# Altium PCB JacdacEdgeConnectorSlotsTest 93.PcbDoc
Units mm, origin at the board's own origin, x right, y up, seen from the top; angles counter-clockwise.
Board outline 54.54 x 20.7 mm, 2 copper layers (Top Layer, Bottom Layer), stack 1.525 mm thick; 10 components, 1 nets, 116 pads, 10 vias.
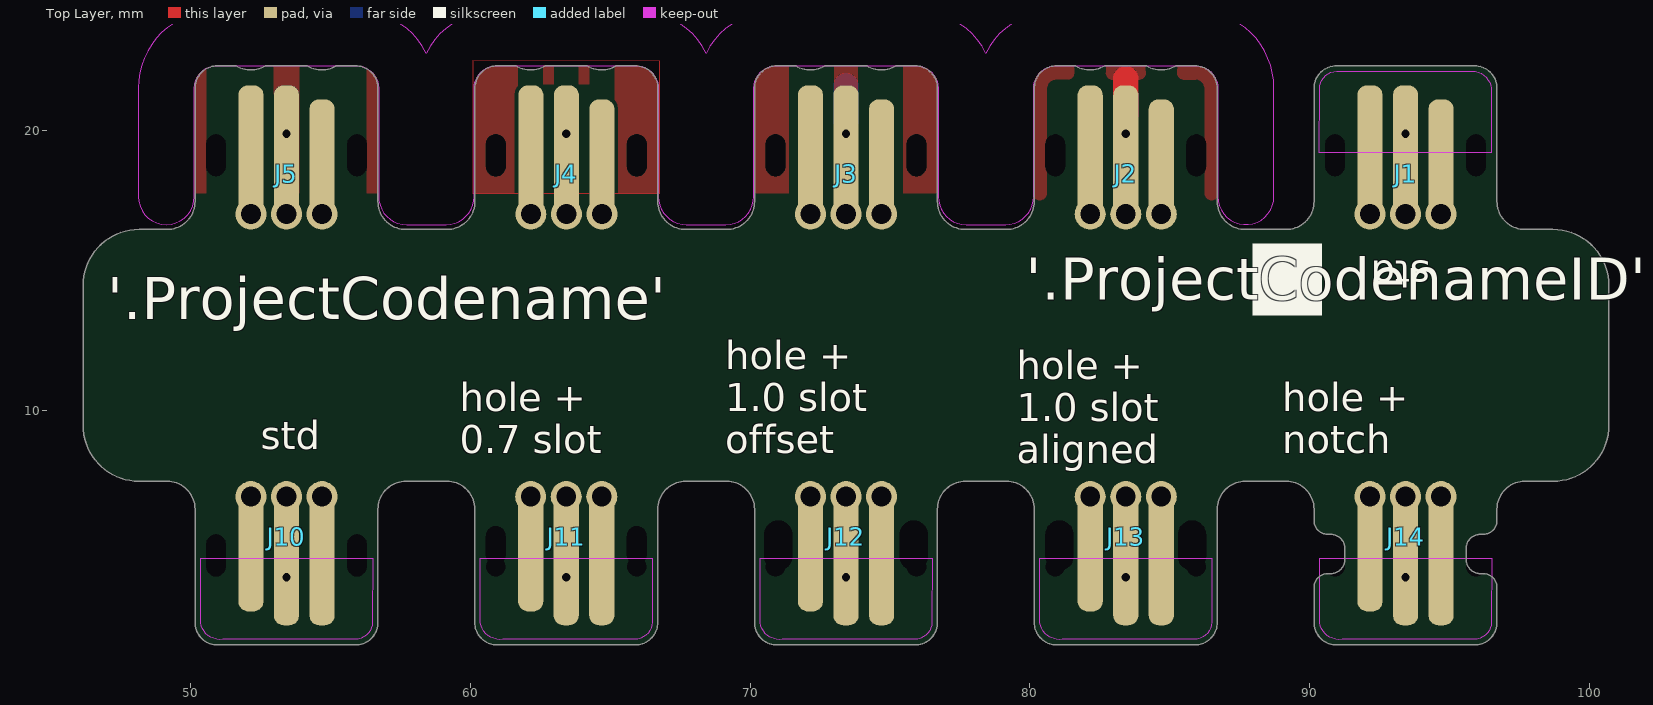
[diagram p0: Top Layer view]
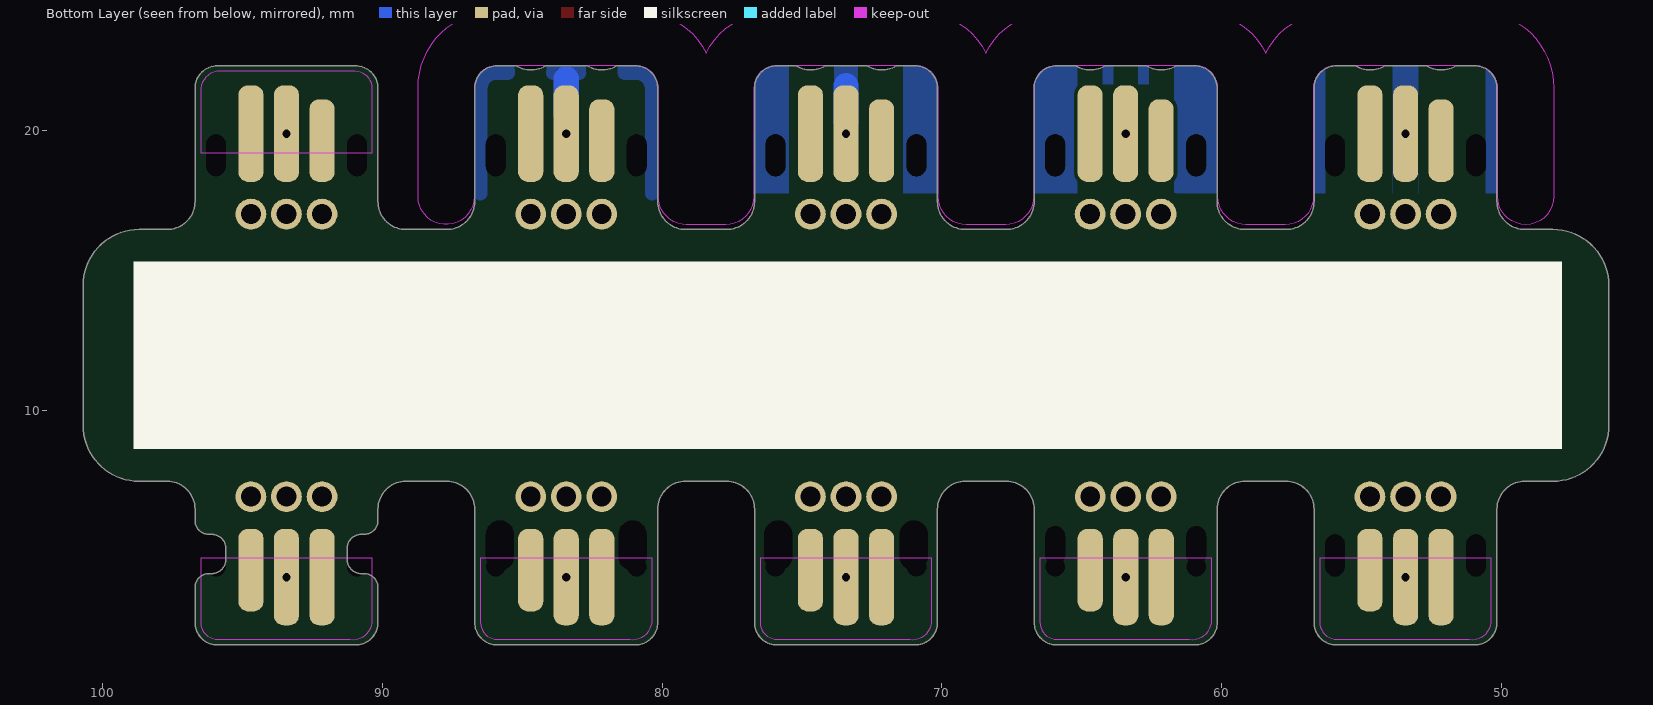
[diagram p1: Bottom Layer view, seen from below]

## Layer stack, top to bottom
Top Solder: solder mask 0.0102, Solder Resist, Dk 3.5
Top Layer: signal copper 0.0356
Dielectric 1: core 1.454, FR-4, Dk 4.2
Bottom Layer: signal copper 0.0356
Bottom Solder: solder mask 0.0102, Solder Resist, Dk 3.5

## Board outline
50.156,2.42 ccw(c50.956,2.42) 50.956,1.62 55.896,1.62 ccw(c55.896,2.42) 56.696,2.42 56.696,6.47 cw(c57.696,6.47) 57.696,7.47 59.156,7.47 cw(c59.156,6.47) 60.156,6.47 60.156,2.42 ccw(c60.956,2.42) 60.956,1.62 65.896,1.62 ccw(c65.896,2.42) 66.696,2.42 66.696,6.47 cw(c67.696,6.47) 67.696,7.47 69.156,7.47 cw(c69.156,6.47) 70.156,6.47 70.156,2.42 ccw(c70.956,2.42) 70.956,1.62 75.896,1.62 ccw(c75.896,2.42) 76.696,2.42 76.696,6.47 cw(c77.696,6.47) 77.696,7.47 79.156,7.47 cw(c79.156,6.47) 80.156,6.47 80.156,2.42 ccw(c80.956,2.42) 80.956,1.62 85.896,1.62 ccw(c85.896,2.42) 86.696,2.42 86.696,6.47 cw(c87.696,6.47) 87.696,7.47 89.156,7.47 cw(c89.156,6.47) 90.156,6.47 90.156,6.07 ccw(c90.656,6.07) 90.656,5.57 90.756,5.57 cw(c90.756,5.07) 91.256,5.07 91.256,4.67 cw(c90.756,4.67) 90.756,4.17 90.656,4.17 ccw(c90.656,3.67) 90.156,3.67 90.156,2.42 ccw(c90.956,2.42) 90.956,1.62 95.896,1.62 ccw(c95.896,2.42) 96.696,2.42 96.696,3.67 ccw(c96.196,3.67) 96.196,4.17 96.096,4.17 cw(c96.096,4.67) 95.596,4.67 95.596,5.07 cw(c96.096,5.07) 96.096,5.57 96.196,5.57 ccw(c96.196,6.07) 96.696,6.07 96.696,6.47 cw(c97.696,6.47) 97.696,7.47 98.696,7.47 ccw(c98.696,9.47) 100.696,9.47 100.696,14.47 ccw(c98.696,14.47) 98.696,16.47 97.696,16.47 cw(c97.696,17.47) 96.696,17.47 96.696,21.52 ccw(c95.896,21.52) 95.896,22.32 90.956,22.32 ccw(c90.956,21.52) 90.156,21.52 90.156,17.47 cw(c89.156,17.47) 89.156,16.47 87.696,16.47 cw(c87.696,17.47) 86.696,17.47 86.696,21.52 ccw(c85.896,21.52) 85.896,22.32 85.223,22.32 85.221,22.322 cw(c84.691,23.17) 84.168,22.318 84.164,22.32 82.678,22.32 cw(c82.151,23.17) 81.628,22.318 81.629,22.32 80.956,22.32 ccw(c80.956,21.52) 80.156,21.52 80.156,17.47 cw(c79.156,17.47) 79.156,16.47 77.696,16.47 cw(c77.696,17.47) 76.696,17.47 76.696,21.52 ccw(c75.896,21.52) 75.896,22.32 75.223,22.32 75.221,22.322 cw(c74.691,23.17) 74.168,22.318 74.164,22.32 72.678,22.32 cw(c72.151,23.17) 71.628,22.318 71.629,22.32 70.956,22.32 ccw(c70.956,21.52) 70.156,21.52 70.156,17.47 cw(c69.156,17.47) 69.156,16.47 67.701,16.47 cw(c67.701,17.47) 66.701,17.47 66.701,21.52 ccw(c65.901,21.52) 65.901,22.32 65.899,22.32 65.226,22.32 65.225,22.322 cw(c64.694,23.17) 64.171,22.317 64.168,22.32 62.681,22.32 cw(c62.154,23.17) 61.631,22.317 61.633,22.32 60.959,22.32 60.961,22.32 ccw(c60.961,21.52) 60.161,21.52 60.161,17.47 cw(c59.161,17.47) 59.161,16.47 57.696,16.47 cw(c57.696,17.47) 56.696,17.47 56.696,21.52 ccw(c55.896,21.52) 55.896,22.32 55.223,22.32 55.221,22.322 cw(c54.691,23.17) 54.168,22.318 54.164,22.32 52.678,22.32 cw(c52.151,23.17) 51.628,22.318 51.629,22.32 50.956,22.32 ccw(c50.956,21.52) 50.156,21.52 50.156,17.47 cw(c49.156,17.47) 49.156,16.47 48.156,16.47 ccw(c48.156,14.47) 46.156,14.47 46.156,9.47 ccw(c48.156,9.47) 48.156,7.47 49.156,7.47 cw(c49.156,6.47) 50.156,6.47
cut-out: 48.131,17.644 ccw(c49.131,17.644) 50.131,17.644 50.131,21.517 ccw(c49.131,21.52) 50.131,21.52 cw(c50.931,21.52) 50.931,22.319 55.921,22.319 cw(c55.921,21.52) 56.721,21.52 ccw(c57.72,21.52) 56.721,21.518 56.721,17.644 ccw(c57.721,17.644) 57.721,16.644 59.131,16.644 ccw(c59.131,17.644) 60.131,17.644 60.131,21.518 60.131,21.52 cw(c60.931,21.52) 60.931,22.319 65.921,22.319 cw(c65.921,21.52) 66.721,21.52 ccw(c67.72,21.52) 66.721,21.518 66.721,17.644 ccw(c67.721,17.644) 67.721,16.644 69.131,16.644 ccw(c69.131,17.644) 70.131,17.644 70.131,21.518 70.131,21.52 cw(c70.931,21.52) 70.931,22.319 75.921,22.319 cw(c75.921,21.52) 76.721,21.52 ccw(c77.72,21.52) 76.721,21.518 76.721,17.644 ccw(c77.721,17.644) 77.721,16.644 79.131,16.644 ccw(c79.131,17.644) 80.131,17.644 80.131,21.518 80.131,21.52 cw(c80.931,21.52) 80.931,22.319 85.921,22.319 cw(c85.921,21.52) 86.721,21.52 ccw(c87.72,21.52) 86.721,21.518 86.721,17.644 ccw(c87.721,17.644) 88.721,17.644 88.721,21.52 ccw(c87.721,21.52) 88.721,21.523 ccw(c85.921,21.52) 85.921,24.32 80.931,24.32 ccw(c80.931,21.52) 78.426,22.772 ccw(c75.921,21.52) 75.921,24.32 70.931,24.32 ccw(c70.931,21.52) 68.426,22.772 ccw(c65.921,21.52) 65.921,24.32 60.931,24.32 ccw(c60.931,21.52) 58.426,22.772 ccw(c55.921,21.52) 55.921,24.32 50.931,24.32 ccw(c50.931,21.52) 48.131,21.524 ccw(c50.441,21.52) 48.131,21.52 cw(c48.952,21.521) 48.131,21.524 48.131,21.52

## Design rules (kind name [scope] priority, off if disabled: settings)
AssemblyTestPointUsage [All] p1: valid=2
BoardOutlineClearance [All] p1: gap=0 ignorepadtopadclearanceinfootprint=FALSE
Clearance [All] p1: gap=0.14 ignorepadtopadclearanceinfootprint=FALSE except(0: Track-Poly SMDPad-Poly THPad-Poly Poly-Region Poly-Hole)
ComponentClearance MH5.0KeepoutaAreaClearance [InComponent('MH1') or InComponent('MH2')  or InComponent('MH3') or InComponent('MH4') vs InComponent('D6') or InComponent('D7') or InComponent('D8') or InComponent('D9') or InComponent('D10') or InComponent('D11') or InComponent('D12') or InComponent('D13') or InComponent('C6') or InComponent('C7') or InComponent('C8')  or  InComponent('C9') or  InComponent('C12')] p1: gap=0 collisioncheckmode=3 verticalgap=0 showdistances=FALSE
ComponentClearance [All] p2: gap=0.2 collisioncheckmode=3 verticalgap=0.2 showdistances=FALSE
DiffPairsRouting [All] p1: maxlimit=2 minlimit=0.15 mostfreqgap=0.15 toplayer_minwidth=0.15 toplayer_maxwidth=2 toplayer_prefwidth=0.15 bottomlayer_minwidth=0.15 bottomlayer_maxwidth=2 bottomlayer_prefwidth=0.15 maxuncoupledlength=25
FabricationTestPointUsage [All] p1: valid=2 allowmultiple=FALSE
HoleSize [All] p1: absolutevalues=TRUE maxlimit=5 minlimit=0.2 maxpercent=80.000 minpercent=20.000
HoleToHoleClearance HoleToHoleClearance_J3_J4 [InComponent('J3') vs InComponent('J4')] p1: gap=2.54 allowstackedmicrovias=TRUE
HoleToHoleClearance [All] p2: gap=0.254 allowstackedmicrovias=TRUE
MinimumSolderMaskSliver [All] p1: minsoldermaskwidth=0.005
PlaneClearance [All] p1: clearance=0.3
PlaneConnect [All] p1: planeconnectstyle=Relief reliefexpansion=0.5 reliefentries=4 reliefconductorwidth=0.2 reliefairgap=0.3
PolygonConnect "PolygonConnect GND" [isVIA] p1: connectstyle=Relief reliefconductorwidth=0.2 reliefentries=4 polygonreliefangle="90 Angle" airgapwidth=0.2
PolygonConnect [All] p2: connectstyle=Relief reliefconductorwidth=0.2 reliefentries=4 polygonreliefangle="90 Angle" airgapwidth=0.2
RoutingVias RoutingVias_Power [InNetClass('Power')] p1: holewidth=0.4 width=0.8 viastyle="Through Hole" minholewidth=0.3 minwidth=0.6 maxholewidth=0.4 maxwidth=1
RoutingVias [All] p2: holewidth=0.3 width=0.6 viastyle="Through Hole" minholewidth=0.3 minwidth=0.6 maxholewidth=0.3 maxwidth=0.8
SilkToSilkClearance [All] p1: silktosilkclearance=0.001
SilkToSolderMaskClearance [IsPad] p1: minsilkscreentomaskgap=0.05 clearancetoexposedcopper=TRUE
SolderMaskExpansion [All] p1: expansion=0.075 istentingtop=FALSE
UnRoutedNet [All] p1: checkbadconnections=TRUE
ViasUnderSMD [not ( HasFootprint('JACDAC_EDGE_CONNECTOR_NO_TRACES') or HasFootprint('JACDAC_EDGE_CONNECTOR_NO_TRACES_CABLE_GUIDE') )] p1: allowed=FALSE
Width Width_Power [InNetClass('Power')] p1: maxlimit=1 minlimit=0.2 preferedwidth=0.5
Width [All] p2: maxlimit=1 minlimit=0.13 preferedwidth=0.13 minimp=50.000000 maximp=50.000000 favimp=50.000000
18 further rules are at their usual default settings.

## Components (designator, comment, footprint, x,y, rotation, side; value= is the part's Value field where it differs from the comment)
J1 "3 pin JACDAC edge connector" JACDAC_EDGE_CONNECTOR_NO_TRACES#1 93.426,16.47 r0 top
J2 "3 pin JACDAC edge connector" JACDAC_EDGE_CONNECTOR_NO_TRACES#2 83.426,16.47 r0 top
J3 "3 pin JACDAC edge connector" JACDAC_EDGE_CONNECTOR_NO_TRACES#2 73.426,16.47 r0 top
J4 "3 pin JACDAC edge connector" JACDAC_EDGE_CONNECTOR_NO_TRACES#2 63.431,16.47 r0 top
J5 "3 pin JACDAC edge connector" JACDAC_EDGE_CONNECTOR_NO_TRACES#2 53.426,16.47 r0 top (schematic designator J4)
J10 "3 pin JACDAC edge connector" JACDAC_EDGE_CONNECTOR_NO_TRACES#1 53.426,7.47 r180 top
J11 "3 pin JACDAC edge connector" JACDAC_EDGE_CONNECTOR_NO_TRACES#3 63.426,7.47 r180 top
J12 "3 pin JACDAC edge connector" JACDAC_EDGE_CONNECTOR_NO_TRACES#4 73.426,7.47 r180 top
J13 "3 pin JACDAC edge connector" JACDAC_EDGE_CONNECTOR_NO_TRACES#4 83.426,7.47 r180 top (schematic designator J12)
J14 "3 pin JACDAC edge connector" JACDAC_EDGE_CONNECTOR_NO_TRACES#4 93.426,7.47 r180 top

## Footprints (in the part's own frame and the unit in brackets; to place one, negate y for a bottom-side part, rotate by r counter-clockwise, add the part's x,y. Pads: shape width x height; smd on the part's side, far side on the other; paste and mask are expansions set on the pad)
JACDAC_EDGE_CONNECTOR_NO_TRACES#1 [mm] "Jacdac 3 pin connector with no traces"
  rrect78% 0.9x2.95 smd far side paste-1 mask+0: 1(-1.27,3.175)
  round 1.11 / inner round 0.71 / far side round 1.1 hole 0.71 paste-0.254 mask+0: 1(1.27,0.55) 2(0,0.55) 3(-1.27,0.55)
  rrect78% 0.9x4.3 smd paste-1 mask+0: 1(1.27,2.5)
  rrect78% 0.9x4.8 smd paste-1 mask+0: 2(0,2.75) 3(-1.27,2.75)
  rrect78% 0.9x3.45 smd far side paste-1 mask+0: 2(0,3.425) 3(1.27,3.425)
  round 0 hole 0.7 slot 1.5 at 90 deg unplated: ""(-2.52,2.65) ""(2.52,2.65)
  Top Layer keep-out region: -3.075,2.75 -3.07,5.033 -2.987,5.341 -2.761,5.567 -2.453,5.65 -2.453,5.65 2.27,5.65 2.545,5.635 2.794,5.516 2.978,5.31 3.07,5.05 3.07,5.05 3.07,2.75
  Bottom Layer lines w0.2: -1.27,0.85 -1.126,0.85
  Bottom Layer keep-out region: -3.07,2.75 -3.07,5.033 -3.023,5.269 -2.889,5.469 -2.689,5.603 -2.453,5.65 -2.453,5.65 2.27,5.65 2.545,5.635 2.794,5.516 2.978,5.31 3.07,5.05 3.07,5.05 3.07,2.75
JACDAC_EDGE_CONNECTOR_NO_TRACES#2 [mm] "Jacdac 3 pin connector with no traces"
  rrect78% 0.9x2.95 smd far side paste-1 mask+0: 1(-1.27,3.175)
  round 1.11 / inner round 0.71 / far side round 1.1 hole 0.71 paste-0.254 mask+0: 1(1.27,0.55) 2(0,0.55) 3(-1.27,0.55)
  rrect78% 0.9x4.3 smd paste-1 mask+0: 1(1.27,2.5)
  rrect78% 0.9x4.8 smd paste-1 mask+0: 2(0,2.75) 3(-1.27,2.75)
  rrect78% 0.9x3.45 smd far side paste-1 mask+0: 2(0,3.425) 3(1.27,3.425)
  round 0 hole 0.7 slot 1.5 at 90 deg unplated: ""(-2.52,2.65) ""(2.52,2.65)
  Bottom Layer lines w0.2: -1.27,0.85 -1.126,0.85
JACDAC_EDGE_CONNECTOR_NO_TRACES#3 [mm] "Jacdac 3 pin connector with no traces"
  rrect78% 0.9x2.95 smd far side paste-1 mask+0: 1(-1.27,3.175)
  rrect78% 0.9x4.3 smd paste-0.254 mask+0: 1(1.27,2.5)
  round 1.11 / inner round 0.71 / far side round 1.1 hole 0.71 paste-1 mask+0: 1(1.27,0.55) 2(0,0.55) 3(-1.27,0.55)
  rrect78% 0.9x3.45 smd far side paste-1 mask+0: 2(0,3.425)
  rrect78% 0.9x4.8 smd paste-0.254 mask+0: 2(0,2.75)
  rrect78% 0.9x4.8 smd paste-1 mask+0: 3(-1.27,2.75)
  rrect78% 0.9x3.45 smd far side paste-0.254 mask+0: 3(1.27,3.425)
  round 0 hole 0.7 unplated: ""(-2.52,3.05) ""(2.52,3.05)
  Top Layer keep-out region: -3.075,2.75 -3.07,5.033 -2.987,5.341 -2.761,5.567 -2.453,5.65 -2.453,5.65 2.27,5.65 2.545,5.635 2.794,5.516 2.978,5.31 3.07,5.05 3.07,5.05 3.07,2.75
  Bottom Layer lines w0.2: -1.126,0.85 -1.27,0.85
  Bottom Layer keep-out region: -3.07,2.75 -3.07,5.033 -3.023,5.269 -2.889,5.469 -2.689,5.603 -2.453,5.65 -2.453,5.65 2.27,5.65 2.545,5.635 2.794,5.516 2.978,5.31 3.07,5.05 3.07,5.05 3.07,2.75
JACDAC_EDGE_CONNECTOR_NO_TRACES#4 [mm] "Jacdac 3 pin connector with no traces"
  rrect78% 0.9x2.95 smd far side paste-1 mask+0: 1(-1.27,3.175)
  rrect78% 0.9x4.3 smd paste-1 mask+0: 1(1.27,2.5)
  round 1.11 / inner round 0.71 / far side round 1.1 hole 0.71 paste-0.254 mask+0: 1(1.27,0.55) 2(0,0.55) 3(-1.27,0.55)
  rrect78% 0.9x3.45 smd far side paste-1 mask+0: 2(0,3.425) 3(1.27,3.425)
  rrect78% 0.9x4.8 smd paste-1 mask+0: 2(0,2.75) 3(-1.27,2.75)
  round 0 hole 0.7 unplated: ""(-2.52,3.05) ""(2.52,3.05)
  Top Layer keep-out region: -3.075,2.75 -3.07,5.033 -2.987,5.341 -2.761,5.567 -2.453,5.65 -2.453,5.65 2.27,5.65 2.545,5.635 2.794,5.516 2.978,5.31 3.07,5.05 3.07,5.05 3.07,2.75
  Bottom Layer lines w0.2: -1.126,0.85 -1.27,0.85
  Bottom Layer keep-out region: -3.07,2.75 -3.07,5.033 -3.023,5.269 -2.889,5.469 -2.689,5.603 -2.453,5.65 -2.453,5.65 2.27,5.65 2.545,5.635 2.794,5.516 2.978,5.31 3.07,5.05 3.07,5.05 3.07,2.75

## Part data
J1 J2 J3 J4 J5 J10 J11 J12 J13 J14: library part "Jacdac edge connector", "3 pin Jacdac edge connector 1.27mm pitch", Manufacturer Part Number=JACDAC_EDGE_CONNECTOR, Checked By=?, ComponentLink1Description="Yuliang JACDAC cable connector drawing online", ComponentLink1URL=https://github.com/microsoft/jacdac-mdk/blob/main/connector/JACDAC-Connector-by-Yuliang-2020-11-28.pdf, ComponentLink2Description="JACDAC PCB edge connector spec onlin", ComponentLink2URL=https://github.com/microsoft/jacdac-mdk/blob/main/connector/JACDAC_PCB_Edge_Connector_Drawing_JD-PEC-01_rev_01.pdf, Created By="D. Gakure"

## Free pads (board coordinates)
  round 0 hole 0.7 slot 1.4 at 90 deg unplated: ""(60.906,5.17) ""(65.946,5.17)
  round 0 hole 1 slot 1.8 at 90 deg unplated: ""(71.006,5.17) ""(75.846,5.17) ""(81.056,5.17) ""(85.796,5.17)

## Via types
v1: diameter 0.6, hole 0.3, Top Layer to Bottom Layer, tented both sides, 10 vias

## Nets (pads, with @x,y where several pads share a name; then routed paths per layer and width w, separated by ;. In a path a pad name is that pad's centre, name@x,y a point inside that pad or via, vN(x,y) a via of type N, cw(c..) or ccw(c..) an arc to the next point about the centre after c; other vN are vias at no path point)
GND: J3.2 | length 1.3
  Bottom Layer w0.9: J3.2@73.425,20.321 73.425,21.621
  other v1: 73.426,19.895
pads on no net: J1. J1.1 J1.2 J1.3 J2. J2.1 J2.2 J2.3 J3. J3.1 J3.3 J4. J4.1 J4.2 J4.3 J5. J5.1 J5.2 J5.3 J10. J10.1 J10.2 J10.3 J11. J11.1 J11.2 J11.3 J12. J12.1 J12.2 J12.3 J13. J13.1 J13.2 J13.3 J14. J14.1 J14.2 J14.3
copper on no net: | length 2.6
  Top Layer w0.9: 83.426,20.57 83.426,21.87
  Bottom Layer w0.9: 83.426,20.57 83.426,21.87
  other v1: 53.426,4.045 63.426,4.045 73.426,4.045 83.426,4.045 93.426,4.045 53.426,19.895 63.431,19.895 83.426,19.895 93.426,19.895

## Polygon pours and split planes (outlines as drawn)
no net on Top Layer "NONET_L01_P031" (solid, pour order 31): 50.081,22.494 50.081,17.762 56.771,17.762 56.771,22.482
no net on Top Layer "NONET_L01_P027" (solid, pour order 27): 86.746,17.762 cw(c86.496,17.762) 86.246,17.762 86.246,21.52 ccw(c85.946,21.52) 85.947,21.819 ccw(c85.946,21.745) 85.946,21.819 85.521,21.819 cw(c85.521,22.07) 85.271,22.07 cw(c85.521,22.07) 85.272,22.092 85.277,22.317 cw(c85.282,22.317) 85.282,22.323 85.589,22.323 cw(c85.589,22.317) 85.594,22.32 85.946,22.32 ccw(c85.945,22.07) 85.945,22.32 85.946,22.32 cw(c85.946,21.52) 86.746,21.52
no net on Top Layer "NONET_L01_P026" (solid, pour order 26): 82.72,22.107 82.725,22.317 cw(c82.73,22.317) 82.73,22.323 83.037,22.323 cw(c83.037,22.317) 83.042,22.32 83.81,22.32 cw(c83.815,22.317) 83.815,22.323 84.122,22.323 cw(c84.122,22.317) 84.127,22.317 84.131,22.152 cw(c83.894,22.07) 84.145,22.07 cw(c83.894,22.07) 83.894,21.819 82.968,21.819 cw(c82.968,22.07)
no net on Top Layer "NONET_L01_P025" (solid, pour order 25): 80.106,17.762 ccw(c80.356,17.762) 80.606,17.762 80.606,21.52 cw(c80.906,21.52) 80.905,21.819 cw(c80.906,21.745) 80.906,21.819 81.331,21.819 ccw(c81.331,22.07) 81.581,22.07 ccw(c81.331,22.07) 81.58,22.092 81.575,22.317 ccw(c81.57,22.317) 81.57,22.323 81.263,22.323 ccw(c81.263,22.317) 81.258,22.32 80.906,22.32 cw(c80.907,22.07) 80.907,22.32 80.906,22.32 ccw(c80.906,21.52) 80.106,21.52
GND on Top Layer "GND_L01_P011" (solid, pour order 11): 70.081,22.494 70.081,17.762 76.771,17.762 76.771,22.482
no net on Top Layer "NONET_L01_P010" (solid, pour order 10): 60.081,22.494 60.081,17.762 66.771,17.762 66.771,22.482
no net on Top Layer "NONET_L01_P009" (solid, pour order 9): 60.081,22.494 60.081,17.762 66.771,17.762 66.771,22.482
no net on Bottom Layer "NONET_L02_P021" (solid, pour order 21): 50.081,22.494 50.081,17.762 56.771,17.762 56.771,22.482
no net on Bottom Layer "NONET_L02_P030" (solid, pour order 30): 82.72,22.107 82.725,22.317 cw(c82.73,22.317) 82.73,22.323 83.037,22.323 cw(c83.037,22.317) 83.042,22.32 83.81,22.32 cw(c83.815,22.317) 83.815,22.323 84.122,22.323 cw(c84.122,22.317) 84.127,22.317 84.131,22.152 cw(c83.894,22.07) 84.145,22.07 cw(c83.894,22.07) 83.894,21.819 82.968,21.819 cw(c82.968,22.07)
no net on Bottom Layer "NONET_L02_P029" (solid, pour order 29): 80.106,17.762 ccw(c80.356,17.762) 80.606,17.762 80.606,21.52 cw(c80.906,21.52) 80.905,21.819 cw(c80.906,21.745) 80.906,21.819 81.331,21.819 ccw(c81.331,22.07) 81.581,22.07 ccw(c81.331,22.07) 81.58,22.092 81.575,22.317 ccw(c81.57,22.317) 81.57,22.323 81.263,22.323 ccw(c81.263,22.317) 81.258,22.32 80.906,22.32 cw(c80.907,22.07) 80.907,22.32 80.906,22.32 ccw(c80.906,21.52) 80.106,21.52
no net on Bottom Layer "NONET_L02_P028" (solid, pour order 28): 86.746,17.762 cw(c86.496,17.762) 86.246,17.762 86.246,21.52 ccw(c85.946,21.52) 85.947,21.819 ccw(c85.946,21.745) 85.946,21.819 85.521,21.819 cw(c85.521,22.07) 85.271,22.07 cw(c85.521,22.07) 85.272,22.092 85.277,22.317 cw(c85.282,22.317) 85.282,22.323 85.589,22.323 cw(c85.589,22.317) 85.594,22.32 85.946,22.32 ccw(c85.945,22.07) 85.945,22.32 85.946,22.32 cw(c85.946,21.52) 86.746,21.52
GND on Bottom Layer "GND_L02_P014" (solid, pour order 14): 70.131,22.494 70.131,17.762 76.821,17.762 76.821,22.482
no net on Bottom Layer "NONET_L02_P001" (solid, pour order 1): 60.081,22.494 60.081,17.762 66.771,17.762 66.771,22.482

## Other copper
Top Layer:
  pour cut-out: 56.294,22.488 56.294,17.762 53.879,17.762 53.879,22.488
  pour cut-out: 50.558,22.488 50.558,17.762 52.977,17.762 52.977,22.488
  pour cut-out: 71.371,22.488 71.371,17.762 73.002,17.762 73.002,22.488
  pour cut-out: 75.481,22.488 75.481,17.762 73.85,17.762 73.85,22.488
  text "GTL - Top Layer" at 2.801,30.093 h1.7
Bottom Layer:
  pour cut-out: 52.977,18.41 52.977,17.762 53.879,17.762 53.879,18.41
  pour cut-out: 50.558,22.488 50.558,17.762 52.977,17.762 52.977,22.488
  pour cut-out: 56.294,22.488 56.294,17.762 53.879,17.762 53.879,22.488
  pour cut-out: 71.7,20.128 75.151,20.128 75.151,17.776 71.7,17.776
  pour cut-out: 71.371,22.488 71.371,17.762 73.002,17.762 73.002,22.488
  pour cut-out: 75.481,22.488 75.481,17.762 73.85,17.762 73.85,22.488
  pour cut-out: 61.701,22.488 61.701,17.762 62.601,17.762 62.601,22.488
  pour cut-out: 65.151,22.488 65.151,17.762 64.251,17.762 64.251,22.488
  pour cut-out: 61.7,21.669 65.151,21.669 65.151,17.776 61.7,17.776
  pour cut-out: 62.971,22.488 62.971,17.762 63.871,17.762 63.871,22.488
  text "GBL - Bottom Layer" at 2.801,28.593 h1.7

## Silkscreen, mask and mechanical layers (free items; w line width, h text height)
Top Overlay:
  region: 87.953,15.97 87.953,13.395 90.433,13.395 90.433,15.97
  text "GTO - Top Overlay" at 17.301,27.057 h1.7
  text "std" at 94.314,15.35 h1 r180
  text "'.ProjectCodenameID'-'.ProjectRevision'" at 79.852,13.966 h1.5
  text "'.ProjectCodename'" at 47.027,13.266 h1.5
  text "std" at 52.512,8.62 h1
  text "hole + / 0.7 slot" at 59.611,8.47 h1
  text "hole + / 1.0 slot / offset" at 69.111,8.47 h1
  text "hole + / notch" at 89.027,8.47 h1
  text "hole + / 1.0 slot / aligned" at 79.527,8.12 h1
Bottom Overlay:
  region: 47.829,15.32 47.829,8.62 98.9,8.62 98.9,15.32
  text "GBO - Bottom Overlay" at 17.301,25.557 h1.7
Top Paste:
  text "GTP - Top Paste" at 30.501,30.093 h1.7
Bottom Paste:
  text "GBP - Bottom Paste" at 30.501,28.593 h1.7
Top Solder:
  text "GTS - Top Solder (resist)" at 30.501,27.057 h1.7
Bottom Solder:
  text "GBS - Bottom Solder (resist)" at 30.501,25.557 h1.7
Fabrication Notes:
  lines w0.1: 15.826,16.47 45.827,16.466 ; 16.126,19.107 16.476,19.457 ; 16.148,7.37 46.149,7.374 ; 16.448,4.733 16.798,4.383 ; 16.476,16.478 16.476,19.457 ; 16.798,7.362 16.798,4.383 ; 16.826,19.107 16.476,19.457 ; 17.148,4.733 16.798,4.383 ; 48.131,25.105 48.131,25.992 89.187,25.989 ; 68.159,25.99 68.159,27.25 ; 89.187,25.101 89.187,25.988
  lines w0.2: 50.156,17.47 50.156,21.52 cw(c50.956,21.52) 50.556,22.213 ; 52.977,22.32 53.879,22.32 ; 56.296,22.213 cw(c55.896,21.52) 56.696,21.52 56.696,17.47 ; 60.156,17.47 60.156,21.52 cw(c60.956,21.52) 60.956,22.32 ; 60.956,22.32 61.629,22.32 ; 62.601,22.32 62.971,22.32 ; 63.881,22.32 64.251,22.32 ; 65.178,22.32 65.896,22.32 cw(c65.896,21.52) 66.696,21.52 66.696,17.47 ; 70.156,17.47 70.156,21.52 cw(c70.956,21.52) 70.956,22.32 ; 70.956,22.32 71.371,22.32 ; 72.977,22.32 73.879,22.32 ; 75.481,22.319 75.896,22.32 cw(c75.896,21.52) 76.696,21.52 76.696,17.47 ; 80.156,17.47 80.156,21.52 cw(c80.956,21.52) 80.956,22.32 ; 80.956,22.32 81.57,22.32 ; 82.73,22.32 84.125,22.32 ; 85.278,22.321 85.896,22.32 cw(c85.896,21.52) 86.696,21.52 86.696,17.47
  text "much of this side of the PCB is edge-plated. the 0.2mm tracks/arcs below indicate where plating is required. in addition, GM10 contains a router path that defines the entire region that is plated. the board outline (GM11) follows a similar path but also defines incursions where plating is not required." at 47.368,27.534 h1.7
  text "GM3 - Fabrication Notes" at 2.801,27.057 h1.7
  text "non-plated 0.7mm wide slots x10 ->" at 23.489,18.946 h1.7
  text "no board edge pips/ / rat's teeth/mouse bites  / above this line - make  / sure board edge is clean" at -0.371,16.72 h1.7
  text "non-plated slots x8, 0.7mm holes x10 ->" at 21.207,4.521 h1.7
  text "no board edge pips/ / rat's teeth/mouse bites  / below this line - make  / sure board edge is clean" at -0.371,1.856 h1.7
  text "drill holes first then rout the  / slots _into_ the hole as indicated" at 25.176,1.22 h1.7
  text "the following two PDF pages show renders of the top and bottom of the PCB. note that edge-plating is not shown." at 80.75,-9 h1.7
Alignment:
  circle w0.254: c70.999,5.571 r0.368
  circle w0.08: c70.906,4.42 r0.308
  lines w0.01: 82.725,22.073 82.73,22.317 83.037,22.317 ; 83.815,22.317 84.122,22.317 84.127,22.073 ; 81.263,22.317 81.575,22.073 81.57,22.317 81.263,22.317
Additional Outline Info:
  lines w0.05: 49.156,16.47 ccw(c49.156,17.47) 49.498,18.409 49.498,22.72 51.263,22.72 ccw(c52.156,23.17) 53.049,22.72 53.803,22.72 ccw(c54.696,23.17) 55.589,22.72 57.354,22.72 57.354,18.409 ccw(c57.696,17.47) 57.696,16.47 59.156,16.47 ccw(c59.156,17.47) 59.498,18.409 59.498,22.72 61.263,22.72 ccw(c62.156,23.17) 63.049,22.72 63.803,22.72 ccw(c64.696,23.17) 65.589,22.72 67.354,22.72 67.354,18.409 ccw(c67.696,17.47) 67.696,16.47 69.156,16.47 ccw(c69.156,17.47) 69.498,18.409 69.498,22.72 71.263,22.72 ccw(c72.156,23.17) 73.049,22.72 73.803,22.72 ccw(c74.696,23.17) 75.589,22.72 77.354,22.72 77.354,18.409 ccw(c77.696,17.47) 77.696,16.47 79.156,16.47 ccw(c79.156,17.47) 79.498,18.409 79.498,22.72 81.263,22.72 ccw(c82.156,23.17) 83.049,22.72 83.803,22.72 ccw(c84.696,23.17) 85.589,22.72 87.354,22.72 87.354,18.409 ccw(c87.696,17.47) 87.696,16.47
Board Cutout:
  lines w2: 49.131,17.644 49.131,21.52 cw(c50.931,21.52) 50.931,23.32 55.921,23.32 cw(c55.921,21.52) 57.721,21.52 57.721,17.644 59.131,17.644 59.131,21.52 cw(c60.931,21.52) 60.931,23.32 65.921,23.32 cw(c65.921,21.52) 67.721,21.52 67.721,17.644 69.131,17.644 69.131,21.52 cw(c70.931,21.52) 70.931,23.32 75.921,23.32 cw(c75.921,21.52) 77.721,21.52 77.721,17.644 79.131,17.644 79.131,21.52 cw(c80.931,21.52) 80.931,23.32 85.921,23.32 cw(c85.921,21.52) 87.721,21.52 87.721,17.644
  text "GM10 - Board Cutout" at 2.801,24.057 h1.7
Board Outline:
  lines w0.05: 51.628,22.318 ccw(c52.151,23.17) 52.678,22.32 ; 51.629,22.32 50.956,22.32 ccw(c50.956,21.52) 50.156,21.52 50.156,17.47 cw(c49.156,17.47) 49.156,16.47 48.156,16.47 ccw(c48.156,14.47) 46.156,14.47 46.156,9.47 ccw(c48.156,9.47) 48.156,7.47 49.156,7.47 cw(c49.156,6.47) 50.156,6.47 50.156,2.42 ccw(c50.956,2.42) 50.956,1.62 55.896,1.62 ccw(c55.896,2.42) 56.696,2.42 56.696,6.47 cw(c57.696,6.47) 57.696,7.47 59.156,7.47 cw(c59.156,6.47) 60.156,6.47 60.156,2.42 ccw(c60.956,2.42) 60.956,1.62 65.896,1.62 ccw(c65.896,2.42) 66.696,2.42 66.696,6.47 cw(c67.696,6.47) 67.696,7.47 69.156,7.47 cw(c69.156,6.47) 70.156,6.47 70.156,2.42 ccw(c70.956,2.42) 70.956,1.62 75.896,1.62 ccw(c75.896,2.42) 76.696,2.42 76.696,6.47 cw(c77.696,6.47) 77.696,7.47 79.156,7.47 cw(c79.156,6.47) 80.156,6.47 80.156,2.42 ccw(c80.956,2.42) 80.956,1.62 85.896,1.62 ccw(c85.896,2.42) 86.696,2.42 86.696,6.47 cw(c87.696,6.47) 87.696,7.47 89.156,7.47 cw(c89.156,6.47) 90.156,6.47 90.156,6.07 ccw(c90.656,6.07) 90.656,5.57 90.756,5.57 cw(c90.756,5.07) 91.256,5.07 91.256,4.67 cw(c90.756,4.67) 90.756,4.17 90.656,4.17 ccw(c90.656,3.67) 90.156,3.67 90.156,2.42 ccw(c90.956,2.42) 90.956,1.62 95.896,1.62 ccw(c95.896,2.42) 96.696,2.42 96.696,3.67 ccw(c96.196,3.67) 96.196,4.17 96.096,4.17 cw(c96.096,4.67) 95.596,4.67 95.596,5.07 cw(c96.096,5.07) 96.096,5.57 96.196,5.57 ccw(c96.196,6.07) 96.696,6.07 96.696,6.47 cw(c97.696,6.47) 97.696,7.47 98.696,7.47 ccw(c98.696,9.47) 100.696,9.47 100.696,14.47 ccw(c98.696,14.47) 98.696,16.47 97.696,16.47 cw(c97.696,17.47) 96.696,17.47 96.696,21.52 ccw(c95.896,21.52) 95.896,22.32 90.956,22.32 ccw(c90.956,21.52) 90.156,21.52 90.156,17.47 cw(c89.156,17.47) 89.156,16.47 87.696,16.47 cw(c87.696,17.47) 86.696,17.47 86.696,21.52 ccw(c85.896,21.52) 85.896,22.32 85.223,22.32 ; 52.683,22.32 54.164,22.32 ; 54.168,22.318 ccw(c54.691,23.17) 55.221,22.322 ; 55.223,22.32 55.896,22.32 cw(c55.896,21.52) 56.696,21.52 56.696,17.47 ccw(c57.696,17.47) 57.696,16.47 59.16,16.47 ccw(c59.161,17.47) 60.161,17.47 60.161,21.52 cw(c60.961,21.52) 60.961,22.32 ; 60.959,22.32 61.633,22.32 ; 61.631,22.317 ccw(c62.154,23.17) 62.681,22.32 ; 62.686,22.32 64.168,22.32 ; 64.171,22.317 ccw(c64.694,23.17) 65.225,22.322 ; 65.226,22.32 65.899,22.32 ; 65.901,22.32 cw(c65.901,21.52) 66.701,21.52 66.701,17.47 ccw(c67.701,17.47) 67.701,16.47 69.156,16.47 ccw(c69.156,17.47) 70.156,17.47 70.156,21.52 cw(c70.956,21.52) 70.956,22.32 71.629,22.32 ; 71.628,22.318 ccw(c72.151,23.17) 72.678,22.32 ; 72.683,22.32 74.164,22.32 ; 74.168,22.318 ccw(c74.691,23.17) 75.221,22.322 ; 75.223,22.32 75.896,22.32 cw(c75.896,21.52) 76.696,21.52 76.696,17.47 ccw(c77.696,17.47) 77.696,16.47 79.156,16.47 ccw(c79.156,17.47) 80.156,17.47 80.156,21.52 cw(c80.956,21.52) 80.956,22.32 81.629,22.32 ; 81.628,22.318 ccw(c82.151,23.17) 82.678,22.32 ; 82.683,22.32 84.164,22.32 ; 84.168,22.318 ccw(c84.691,23.17) 85.221,22.322 ; 88.036,25.15 88.062,25.15
  text "GM11 - Board Outline" at 2.801,25.557 h1.7
Top Assy:
  text "GM15 - Top Assy" at 17.301,30.088 h1.7
Bottom Assy:
  text "GM16 - Bottom Assy" at 17.301,28.588 h1.7